# Altium PCB PCB1_1.PcbDoc
Units mil, origin at the board's own origin, x right, y up, seen from the top; angles counter-clockwise.
Board outline 4500 x 2600 mil, 2 copper layers (Top Layer, Bottom Layer), stack 60.4 mil thick; 22 components, 0 nets, 174 pads, 0 vias.
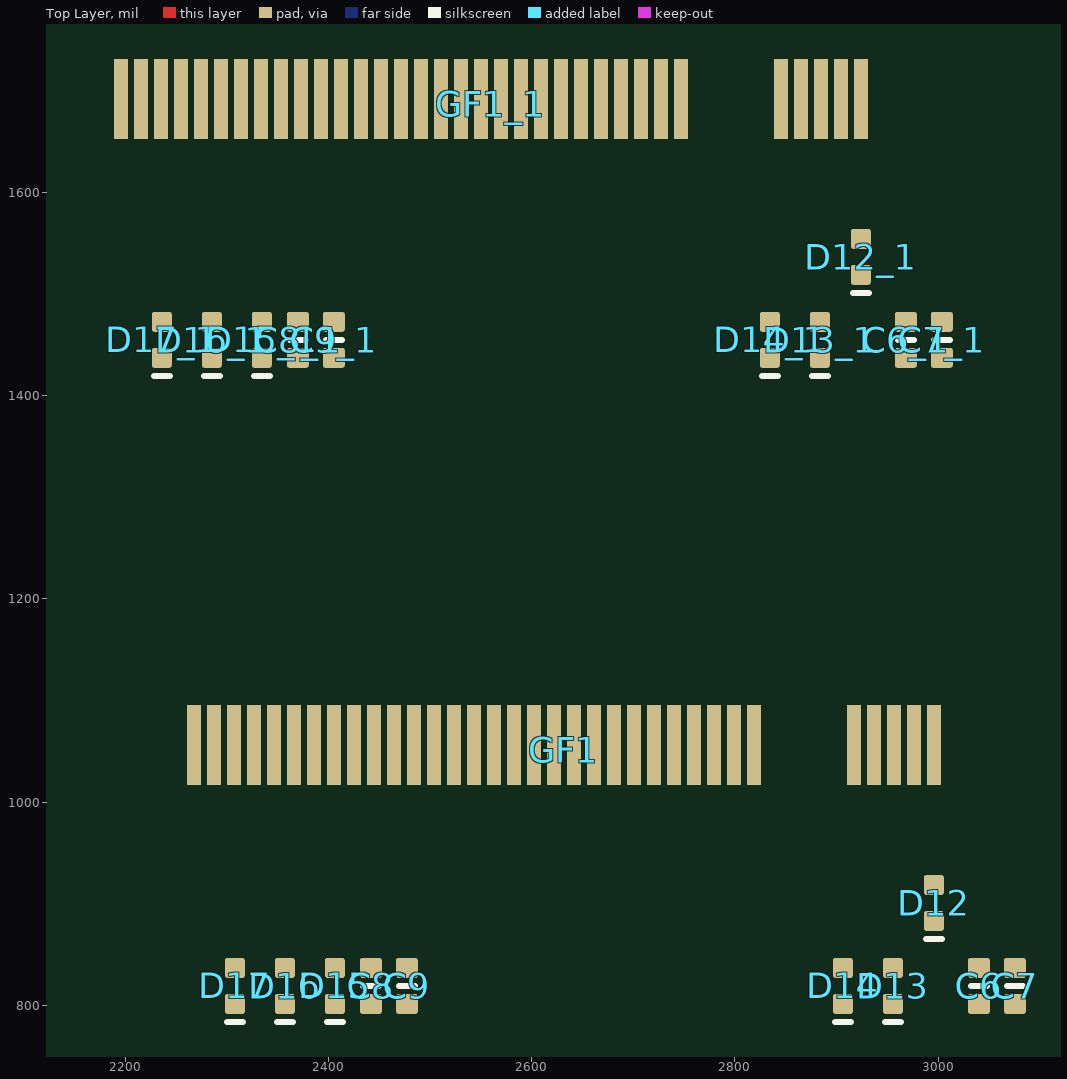
[diagram p0: Top Layer view]
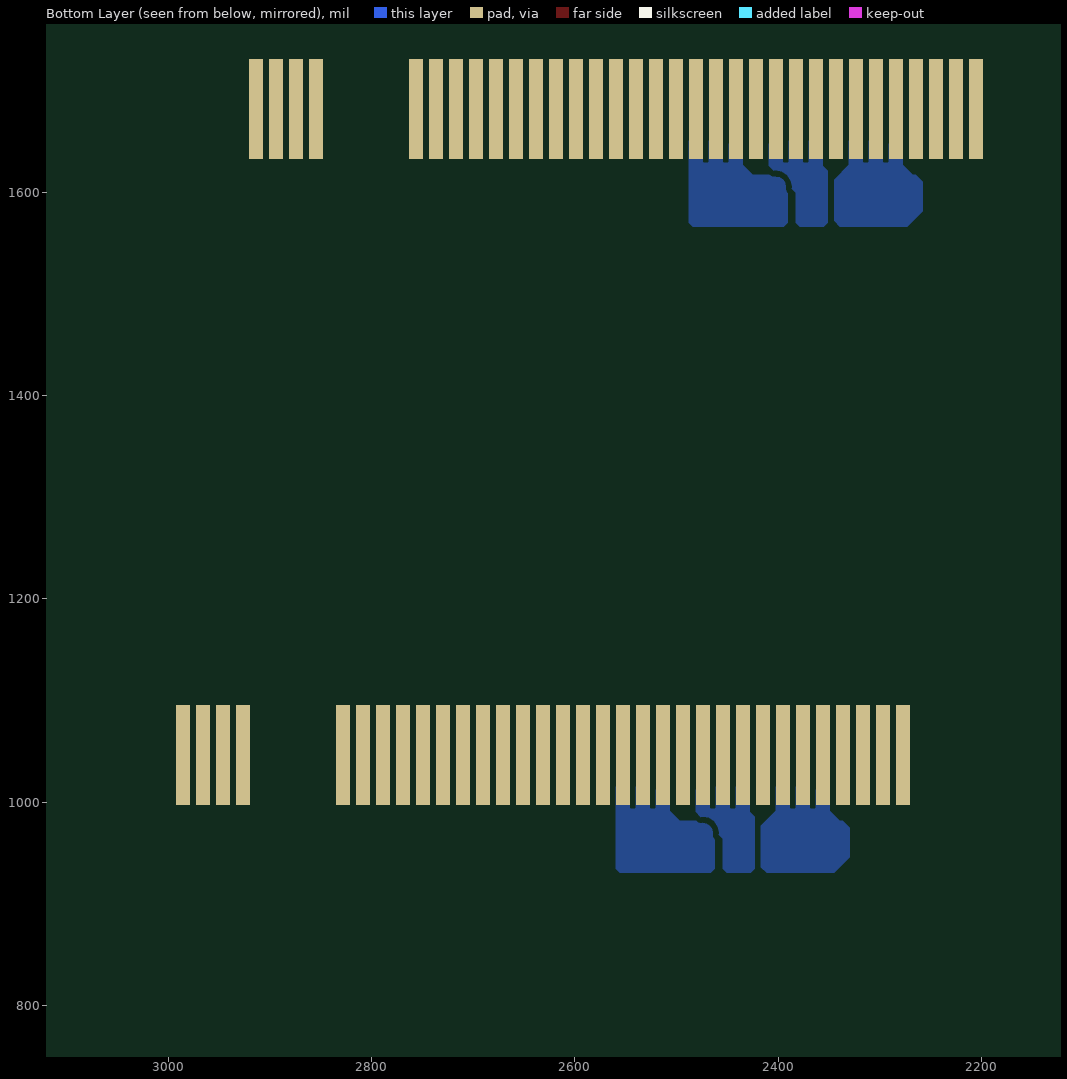
[diagram p1: Bottom Layer view, seen from below]

## Layer stack, top to bottom
Top Solder: solder mask 0.5, Solder Resist, Dk 3.3
Top Layer: signal copper 0.7
Dielectric1: core 59, FR-4, Dk 4.3
Bottom Layer: signal copper 0.7
Bottom Solder: solder mask 0.5, Solder Resist, Dk 3.3

## Board outline
0,0 4500,0 4500,2600 0,2600

## Design rules (kind name [scope] priority, off if disabled: settings)
Clearance [All] p1: gap=10 ignorepadtopadclearanceinfootprint=FALSE
DiffPairsRouting [All] p1: maxlimit=10 minlimit=10 mostfreqgap=10 toplayer_minwidth=10 toplayer_maxwidth=10 toplayer_prefwidth=10 bottomlayer_minwidth=10 bottomlayer_maxwidth=10 bottomlayer_prefwidth=10 maxuncoupledlength=500
HoleSize [All] p1: absolutevalues=TRUE maxlimit=300 minlimit=10 maxpercent=80.000 minpercent=20.000
MinimumAnnularRing [All] p1: minimumring=10
PasteMaskExpansion [All] p1: expansion=10
PlaneClearance [All] p1: clearance=15
PlaneConnect [All] p1: pad.planeconnectstyle=Relief pad.reliefexpansion=20 pad.reliefentries=4 pad.reliefconductorwidth=10 pad.reliefairgap=10 via.planeconnectstyle=Direct via.reliefexpansion=20 via.reliefentries=4 via.reliefconductorwidth=10 via.reliefairgap=10
PolygonConnect [All] p1: thpad.connectstyle=Relief thpad.reliefconductorwidth=10 thpad.reliefentries=4 thpad.polygonreliefangle="90 Angle" thpad.airgapwidth=10 smdpad.connectstyle=Relief smdpad.reliefconductorwidth=10 smdpad.reliefentries=4 smdpad.polygonreliefangle="90 Angle" smdpad.airgapwidth=10 via.connectstyle=Direct via.reliefconductorwidth=10 via.reliefentries=4 via.polygonreliefangle="90 Angle" via.airgapwidth=10
RoutingVias [All] p1: holewidth=10 width=20 viastyle="Through Hole" minholewidth=10 minwidth=20 maxholewidth=10 maxwidth=20
SMDNeckDown [All] p1: percent=100.000
SilkToSolderMaskClearance SilkscreenOverComponentPads [IsPad] p1: minsilkscreentomaskgap=10 clearancetoexposedcopper=TRUE
SolderMaskExpansion [All] p1: expansion=10 istentingtop=FALSE
Width [All] p1: maxlimit=10 minlimit=10 preferedwidth=10
24 further rules are at their usual default settings.

## Components (designator, comment, footprint, x,y, rotation, side; value= is the part's Value field where it differs from the comment)
C6 "Capacitor 10nF +/-20% 50V 0402" CAPC0402(1005)60_L 3040.08,818.96 r90 top value=10nF
C6_1 "Capacitor 10nF +/-20% 50V 0402" CAPC0402(1005)60_L 2968.08,1454.96 r90 top value=10nF (schematic designator C6)
C7 "Capacitor 100nF +/-20% 10V 0402" CAPC0402(1005)60_L 3075.51,818.96 r90 top value=100nF
C7_1 "Capacitor 100nF +/-20% 10V 0402" CAPC0402(1005)60_L 3003.51,1454.96 r90 top value=100nF (schematic designator C7)
C8 "Capacitor 10nF +/-20% 50V 0402" CAPC0402(1005)60_L 2441.65,818.96 r90 top value=10nF
C8_1 "Capacitor 10nF +/-20% 50V 0402" CAPC0402(1005)60_L 2369.65,1454.96 r90 top value=10nF (schematic designator C8)
C9 "Capacitor 100nF +/-20% 10V 0402" CAPC0402(1005)60_L 2477.09,818.96 r90 top value=100nF
C9_1 "Capacitor 100nF +/-20% 10V 0402" CAPC0402(1005)60_L 2405.09,1454.96 r90 top value=100nF (schematic designator C9)
D12 "ESDALC5-1BM2" STM-SOD-882_V 2995.79,900.65 r90 top
D12_1 "ESDALC5-1BM2" STM-SOD-882_V 2923.79,1536.65 r90 top (schematic designator D12)
D13 "ESDALC5-1BM2" STM-SOD-882_V 2955.43,818.96 r90 top
D13_1 "ESDALC5-1BM2" STM-SOD-882_V 2883.43,1454.96 r90 top (schematic designator D13)
D14 "ESDALC5-1BM2" STM-SOD-882_V 2906.22,818.96 r90 top
D14_1 "ESDALC5-1BM2" STM-SOD-882_V 2834.22,1454.96 r90 top (schematic designator D14)
D15 "ESDALC5-1BM2" STM-SOD-882_V 2406.22,818.96 r90 top
D15_1 "ESDALC5-1BM2" STM-SOD-882_V 2334.22,1454.96 r90 top (schematic designator D15)
D16 "ESDALC5-1BM2" STM-SOD-882_V 2357.01,818.96 r90 top
D16_1 "ESDALC5-1BM2" STM-SOD-882_V 2285.01,1454.96 r90 top (schematic designator D16)
D17 "ESDALC5-1BM2" STM-SOD-882_V 2307.8,818.96 r90 top
D17_1 "ESDALC5-1BM2" STM-SOD-882_V 2235.8,1454.96 r90 top (schematic designator D17)
GF1 "NGFF-M-CN-2S-M-R67" NGFF-M-GF-2D-500-1K-S67 2631.61,1056.17 r0 top locked
GF1_1 "NGFF-M-CN-2S-M-R67" NGFF-M-GF-2D-500-1K-S67 2559.61,1692.17 r0 top locked (schematic designator GF1)

## Footprints (in the part's own frame and the unit in brackets; to place one, negate y for a bottom-side part, rotate by r counter-clockwise, add the part's x,y. Pads: shape width x height; smd on the part's side, far side on the other; paste and mask are expansions set on the pad)
CAPC0402(1005)60_L [mm] "Chip Capacitor, Body 1.0x0.5mm, Height 0.6mm, IPC High Density"
  rrect25% 0.5x0.55 smd: 1(-0.45,0) 2(0.45,0)
  silkscreen extent 0,-0.2 0,0.2, body extent -0.5,-0.25 0.5,0.25, height 0.6
NGFF-M-GF-2D-500-1K-S67 [mm] "Golden finger, NGFF key M, Dual, Staggered, Pitch 0.5mm, 47-Position"
  rect 0.35x2 smd paste-0.9: 1(-9.25,0) 3(-8.75,0) 5(-8.25,0) 7(-7.75,0) 9(-7.25,0) 11(-6.75,0) 13(-6.25,0) 15(-5.75,0) 17(-5.25,0) 19(-4.75,0) 21(-4.25,0) 23(-3.75,0) 25(-3.25,0) 27(-2.75,0) 29(-2.25,0) 31(-1.75,0) 33(-1.25,0) 35(-0.75,0) 37(-0.25,0) 39(0.25,0) 41(0.75,0) 43(1.25,0) 45(1.75,0) 47(2.25,0) 49(2.75,0) 51(3.25,0) 53(3.75,0) 55(4.25,0) 57(4.75,0) 67(7.25,0) 69(7.75,0) 71(8.25,0) 73(8.75,0) 75(9.25,0)
  rect 0.35x2.5 smd far side paste-0.9: 2(-9,-0.25) 4(-8.5,-0.25) 6(-8,-0.25) 8(-7.5,-0.25) 10(-7,-0.25) 12(-6.5,-0.25) 14(-6,-0.25) 16(-5.5,-0.25) 18(-5,-0.25) 20(-4.5,-0.25) 22(-4,-0.25) 24(-3.5,-0.25) 26(-3,-0.25) 28(-2.5,-0.25) 30(-2,-0.25) 32(-1.5,-0.25) 34(-1,-0.25) 36(-0.5,-0.25) 38(0,-0.25) 40(0.5,-0.25) 42(1,-0.25) 44(1.5,-0.25) 46(2,-0.25) 48(2.5,-0.25) 50(3,-0.25) 52(3.5,-0.25) 54(4,-0.25) 56(4.5,-0.25) 58(5,-0.25) 68(7.5,-0.25) 70(8,-0.25) 72(8.5,-0.25) 74(9,-0.25)
STM-SOD-882_V [mm] "SOD-882, 2-Leads, Body 1x0.6mm"
  rrect25% 0.5x0.5 smd: 1(-0.45,0) 2(0.45,0)
  silkscreen extent -0.9,-0.2 -0.9,0.2, body extent -0.51,-0.31 0.51,0.31, height 0.49

## Part data
C6 C6_1 C8 C8_1: library part CMP-001-00069-2, "Chip Capacitor, 10nF +/-20%, 50V, 0402, Thickness 0.6 mm", Case/Package=0402, Max Operating Temperature=85°C, Min Operating Temperature=-55°C, Tolerance=5%, Voltage Rating=50V, Mounting Technology=SMT, Pins=2
C7 C7_1 C9 C9_1: library part CMP-001-00061-2, "Chip Capacitor, 100nF +/-20%, 10V, 0402, Thickness 0.6 mm", Case/Package=0402, Max Operating Temperature=85°C, Min Operating Temperature=-55°C, Tolerance=20%, Voltage Rating=10V, Mounting Technology=SMT, Pins=2
D12 D12_1 D13 D13_1 D14 D14_1 D15 D15_1 D16 D16_1 D17 D17_1: library part CMP-004-00030-2, "Single Line Low Capacitance Transil™, 5 V, -55 to 150 degC, 2-Pin SOD-882, RoHS, Tape and Reel", Mounting Technology=SMT, Pins=2
GF1 GF1_1: library part CMP-002-00069-1, "Golden finger, NGFF key M, Dual, Staggered, Pitch 0.5mm, 67-Position", Pins=67, System=Connector

## Nets (pads, with @x,y where several pads share a name; then routed paths per layer and width w, separated by ;. In a path a pad name is that pad's centre, name@x,y a point inside that pad or via, vN(x,y) a via of type N, cw(c..) or ccw(c..) an arc to the next point about the centre after c; other vN are vias at no path point)
pads on no net: C6.1 C6.2 C6_1.1 C6_1.2 C7.1 C7.2 C7_1.1 C7_1.2 C8.1 C8.2 C8_1.1 C8_1.2 C9.1 C9.2 C9_1.1 C9_1.2 D12.1 D12.2 D12_1.1 D12_1.2 D13.1 D13.2 D13_1.1 D13_1.2 D14.1 D14.2 D14_1.1 D14_1.2 D15.1 D15.2 D15_1.1 D15_1.2 D16.1 D16.2 D16_1.1 D16_1.2 D17.1 D17.2 D17_1.1 D17_1.2 GF1.1 GF1.2 GF1.3 GF1.4 GF1.5 GF1.6 GF1.7 GF1.8 GF1.9 GF1.10 GF1.11 GF1.12 GF1.13 GF1.14 GF1.15 GF1.16 GF1.17 GF1.18 GF1.19 GF1.20 GF1.21 GF1.22 GF1.23 GF1.24 GF1.25 GF1.26 GF1.27 GF1.28 GF1.29 GF1.30 GF1.31 GF1.32 GF1.33 GF1.34 GF1.35 GF1.36 GF1.37 GF1.38 GF1.39 GF1.40 GF1.41 GF1.42 GF1.43 GF1.44 GF1.45 GF1.46 GF1.47 GF1.48 GF1.49 GF1.50 GF1.51 GF1.52 GF1.53 GF1.54 GF1.55 GF1.56 GF1.57 GF1.58 GF1.67 GF1.68 GF1.69 GF1.70 GF1.71 GF1.72 GF1.73 GF1.74 GF1.75 GF1_1.1 GF1_1.2 GF1_1.3 GF1_1.4 GF1_1.5 GF1_1.6 GF1_1.7 GF1_1.8 GF1_1.9 GF1_1.10 GF1_1.11 GF1_1.12 GF1_1.13 GF1_1.14 GF1_1.15 GF1_1.16 GF1_1.17 GF1_1.18 GF1_1.19 GF1_1.20 GF1_1.21 GF1_1.22 GF1_1.23 GF1_1.24 GF1_1.25 GF1_1.26 GF1_1.27 GF1_1.28 GF1_1.29 GF1_1.30 GF1_1.31 GF1_1.32 GF1_1.33 GF1_1.34 GF1_1.35 GF1_1.36 GF1_1.37 GF1_1.38 GF1_1.39 GF1_1.40 GF1_1.41 GF1_1.42 GF1_1.43 GF1_1.44 GF1_1.45 GF1_1.46 GF1_1.47 GF1_1.48 GF1_1.49 GF1_1.50 GF1_1.51 GF1_1.52 GF1_1.53 GF1_1.54 GF1_1.55 GF1_1.56 GF1_1.57 GF1_1.58 GF1_1.67 GF1_1.68 GF1_1.69 GF1_1.70 GF1_1.71 GF1_1.72 GF1_1.73 GF1_1.74 GF1_1.75

## Polygon pours and split planes (outlines as drawn)
no net on Bottom Layer "NONET_L02_P005" (solid, pour order 5): 2330.28,1627.2 2347.02,1610.47 2347.02,1574.06 2339.14,1566.18 2256.46,1566.18 2256.46,1609.49 2264.34,1617.36 2267.29,1617.36 2277.13,1627.2 2277.13,1650.83 2290.91,1650.83 2290.91,1630.16 2291.9,1629.17 2295.83,1629.17 2296.82,1630.16 2296.82,1650.83 2310.6,1650.83 2310.6,1630.16 2311.58,1629.17 2315.52,1629.17 2316.5,1630.16 2316.5,1650.83 2330.28,1650.83
no net on Bottom Layer "NONET_L02_P004" (solid, pour order 4): 2473,1629.17 2473.98,1630.16 2473.98,1650.83 2487.76,1650.83 2487.76,1570.12 2483.83,1566.18 2394.26,1566.18 2390.32,1570.12 2390.32,1609.49 2398.2,1617.36 2424.77,1617.36 2434.61,1627.2 2434.61,1650.83 2448.39,1650.83 2448.39,1630.16 2449.38,1629.17 2453.32,1629.17 2454.3,1630.16 2454.3,1650.83 2468.08,1650.83 2468.08,1630.16 2469.06,1629.17
no net on Bottom Layer "NONET_L02_P003" (solid, pour order 3): 2382.45,1570.12 2382.45,1599.65 2409.02,1626.22 2409.02,1650.83 2395.24,1650.83 2395.24,1630.16 2394.26,1629.17 2390.32,1629.17 2389.34,1630.16 2389.34,1650.83 2375.56,1650.83 2375.56,1630.16 2374.58,1629.17 2370.64,1629.18 2369.65,1630.16 2369.65,1650.83 2355.87,1650.83 2355.87,1626.22 2350.95,1621.3 2350.95,1597.68 2350.95,1570.12 2354.89,1566.18 2378.51,1566.18
no net on Bottom Layer "NONET_L02_P002" (solid, pour order 2): 2402.28,991.2 2419.02,974.47 2419.02,938.06 2411.14,930.18 2328.46,930.18 2328.46,973.49 2336.34,981.36 2339.29,981.36 2349.13,991.2 2349.13,1014.83 2362.91,1014.83 2362.91,994.16 2363.9,993.17 2367.83,993.17 2368.82,994.16 2368.82,1014.83 2382.6,1014.83 2382.6,994.16 2383.58,993.17 2387.52,993.17 2388.5,994.16 2388.5,1014.83 2402.28,1014.83
no net on Bottom Layer "NONET_L02_P001" (solid, pour order 1): 2545,993.17 2545.98,994.16 2545.98,1014.83 2559.76,1014.83 2559.76,934.12 2555.83,930.18 2466.26,930.18 2462.32,934.12 2462.32,973.49 2470.2,981.36 2496.77,981.36 2506.61,991.2 2506.61,1014.83 2520.39,1014.83 2520.39,994.16 2521.38,993.17 2525.32,993.17 2526.3,994.16 2526.3,1014.83 2540.08,1014.83 2540.08,994.16 2541.06,993.17
no net on Bottom Layer "NONET_L02_P000" (solid, pour order 0): 2454.45,934.12 2454.45,963.65 2481.02,990.22 2481.02,1014.83 2467.24,1014.83 2467.24,994.16 2466.26,993.17 2462.32,993.17 2461.34,994.16 2461.34,1014.83 2447.56,1014.83 2447.56,994.16 2446.58,993.17 2442.64,993.18 2441.65,994.16 2441.65,1014.83 2427.87,1014.83 2427.87,990.22 2422.95,985.3 2422.95,961.68 2422.95,934.12 2426.89,930.18 2450.51,930.18

## Text inside footprints (layer, text, board x,y; h text height)
GF1: Top Assembly "Board edge" at 2588.31,1123.09 h19.68
GF1_1: Top Assembly "Board edge" at 2516.31,1759.09 h19.68